# EAGLE board LIP 2°Trabalho (EAGLE 9.7.0)

Size 258.79 x 76.63 mm. Coordinates in mm from the lower left corner, seen from the top.
Outline: 0,0 258.79,0 258.79,76.63 0,76.63 0,0
Copper layers (1*16): Top 0.035mm / dielectric 1.5mm / Bottom 0.035mm
Design rules "default": minimum track width 6mil, minimum drill 0.35mm, track to track 6mil, track to pad 6mil, pad to pad 6mil, via to via 6mil, smd to smd 6mil, copper to edge 40mil, drill to drill 6mil, minimum pad ring 10mil, minimum via ring 8mil, stop-mask expansion 4mil, vias tented up to drill 0mil, thermal gap 10mil

## Footprints (pad centres in the part's own frame; a part is rotated, then mirrored left to right if it is on the bottom)
LEDRD254W60D565H860B_B = drill 0.981 pad 1.581: 1 -1.27,0; 2 1.27,0
LEDRD254W60D565H860B_Y = drill 0.981 pad 1.581: 1 -1.27,0; 2 1.27,0
LEDRD254W60D565H860B = drill 0.981 pad 1.581: 1 -1.27,0; 2 1.27,0
LEDRD254W60D565H860B_G = drill 0.981 pad 1.581: 1 -1.27,0; 2 1.27,0
PIEZO = drill 1 pad 1.6: 1 -3.5,0; 2 3.5,0
RESAD1016W63L850D250B = drill 0.83 pad 1.43: 1 -5.08,0; 2 5.08,0
SWITCH-MOMENTARY-PTH-6.5MM = drill 1.016 pad 1.88: 1 -3.251,2.261; 2 3.251,2.261; 3 -3.251,-2.261; 4 3.251,-2.261
ARDUINO-UNO-R3-SHIELD = drill 1.016 pad 1.88: 3.3V 24.13,-2.54; 5V 24.13,0; A0 24.13,12.7; A1 24.13,15.24; A2 24.13,17.78; A3 24.13,20.32; A4 24.13,22.86; A5 24.13,25.4; AREF -24.13,-13.97; D2 -24.13,20.32; D3 -24.13,17.78; D4 -24.13,15.24; D5 -24.13,12.7; D6 -24.13,10.16; D7 -24.13,7.62; D8 -24.13,3.81; D9 -24.13,1.27; D10 -24.13,-1.27; D11 -24.13,-3.81; D12 -24.13,-6.35; D13 -24.13,-8.89; GND@0 24.13,2.54; GND@1 24.13,5.08; GND@2 -24.13,-11.43; IOREF 24.13,-7.62; NC 24.13,-10.16; RES 24.13,-5.08; RX -24.13,25.4; SCL -24.13,-19.05; SDA -24.13,-16.51; TX -24.13,22.86; VIN 24.13,7.62

## Placement (x,y rotation side)
D1  BLUE  [LEDRD254W60D565H860B_B]  208.01,19.13 0 top
D2  YELLOW  [LEDRD254W60D565H860B_Y]  187.06,19.21 180 top
D3  RED  [LEDRD254W60D565H860B]  208.01,31.83 0 top
D4  GREEN  [LEDRD254W60D565H860B_G]  187.06,31.91 180 top
PIEZO1  PIEZO  [PIEZO]  242.77,61.73 0 top
R1  1k  [RESAD1016W63L850D250B]  93.72,34.64 0 top
R2  1k  [RESAD1016W63L850D250B]  93.74,31.62 0 top
R3  1k  [RESAD1016W63L850D250B]  93.72,37.38 0 top
R4  1k  [RESAD1016W63L850D250B]  93.91,28.77 0 top
R5  1k  [RESAD1016W63L850D250B]  209.28,8.97 90 top
R6  1k  [RESAD1016W63L850D250B]  185.79,9.05 90 top
R7  1k  [RESAD1016W63L850D250B]  209.28,44.53 90 top
R8  1k  [RESAD1016W63L850D250B]  185.79,44.61 90 top
R9  1k  [RESAD1016W63L850D250B]  221.98,44.53 90 top
R10  1k  [RESAD1016W63L850D250B]  173.09,44.61 90 top
R11  1k  [RESAD1016W63L850D250B]  173.09,9.05 90 top
R12  1k  [RESAD1016W63L850D250B]  221.98,8.97 90 top
R13  1k  [RESAD1016W63L850D250B]  119.75,44.61 90 top
R14  2k  [RESAD1016W63L850D250B]  252.46,54.69 90 top
R16  1k  [RESAD1016W63L850D250B]  93.93,25.56 0 top
S1  SWITCH_MOMENTARY  [SWITCH-MOMENTARY-PTH-6.5MM]  175.63,17.94 90 top
S2  SWITCH_MOMENTARY  [SWITCH-MOMENTARY-PTH-6.5MM]  219.44,17.86 90 top
S3  SWITCH_MOMENTARY  [SWITCH-MOMENTARY-PTH-6.5MM]  219.44,35.64 90 top
S4  SWITCH_MOMENTARY  [SWITCH-MOMENTARY-PTH-6.5MM]  175.63,35.72 90 top
S5  SWITCH_MOMENTARY  [SWITCH-MOMENTARY-PTH-6.5MM]  122.29,25.56 90 top
U1  ARDUINO-UNO-R3-SHIELD  [ARDUINO-UNO-R3-SHIELD]  47.88,46.78 270 top

## Library data of the parts
D1 = Tinkercad; CATEGORY: Opto-Electronic; SUB-CATEGORY: LED; VALUE: LED_BLUE
D2 = Tinkercad; CATEGORY: Opto-Electronic; SUB-CATEGORY: LED; VALUE: LED_YELLOW
D3 = Tinkercad; CATEGORY: Opto-Electronic; SUB-CATEGORY: LED; VALUE: LED_RED
D4 = Tinkercad; CATEGORY: Opto-Electronic; SUB-CATEGORY: LED; VALUE: LED_GREEN
PIEZO1 R1-R14 R16 S1-S5 U1 = Tinkercad

## Nets
D1_C: D1.2 R5.2
D2_C: D2.2 R6.2
D3_C: D3.2 R7.1
D4_C: D4.2 R8.1
PIEZO1_2: PIEZO1.2 R14.2
S1_2: R2.2 R11.2 S1.1 S1.2
S2_3: R4.2 R12.2 S2.3 S2.4
S3_3: R1.2 R9.1 S3.3 S3.4
S4_1: R3.2 R10.1 S4.1 S4.2
S5_2: R13.1 R16.2 S5.1 S5.2
U1_5V: S1.3 S1.4 S2.1 S2.2 S3.1 S3.2 S4.3 S4.4 S5.3 S5.4 U1.5V
U1_D2: R1.1 U1.D2
U1_D3: R2.1 U1.D3
U1_D4: R4.1 U1.D4
U1_D5: R16.1 U1.D5
U1_D6: D4.1 U1.D6
U1_D7: D3.1 U1.D7
U1_D8: D2.1 U1.D8
U1_D9: D1.1 U1.D9
U1_D10: PIEZO1.1 U1.D10
U1_GND: R5.1 R6.1 R7.2 R8.2 R9.2 R10.2 R11.1 R12.1 R13.2 R14.1 U1.GND@0 U1.GND@1 U1.GND@2
U1_TX: R3.1 U1.TX

## Tracks (layer width: path | path; a pad name or v marks a point on that pad's centre or on a via)
D1_C  (1 unrouted)
D2_C  (1 unrouted)
D3_C  (1 unrouted)
D4_C  (1 unrouted)
PIEZO1_2  (1 unrouted)
S1_2  (3 unrouted)
S2_3  (3 unrouted)
S3_3  (3 unrouted)
S4_1  (3 unrouted)
S5_2  (3 unrouted)
U1_5V  (10 unrouted)
U1_D2  (1 unrouted)
U1_D3  (1 unrouted)
U1_D4  (1 unrouted)
U1_D5  (1 unrouted)
U1_D6  (1 unrouted)
U1_D7  (1 unrouted)
U1_D8  (1 unrouted)
U1_D9  (1 unrouted)
U1_D10  (1 unrouted)
U1_GND  (12 unrouted)
U1_TX  (1 unrouted)